# Altium PCB PCB1.PcbDoc
Units mm, origin at the board's own origin, x right, y up, seen from the top; angles counter-clockwise.
Board outline 42 x 40 mm, 2 copper layers (Top Layer, Bottom Layer); 88 components, 82 nets, 233 pads, 43 vias.
Unrouted connection lines stored in the file: 1.
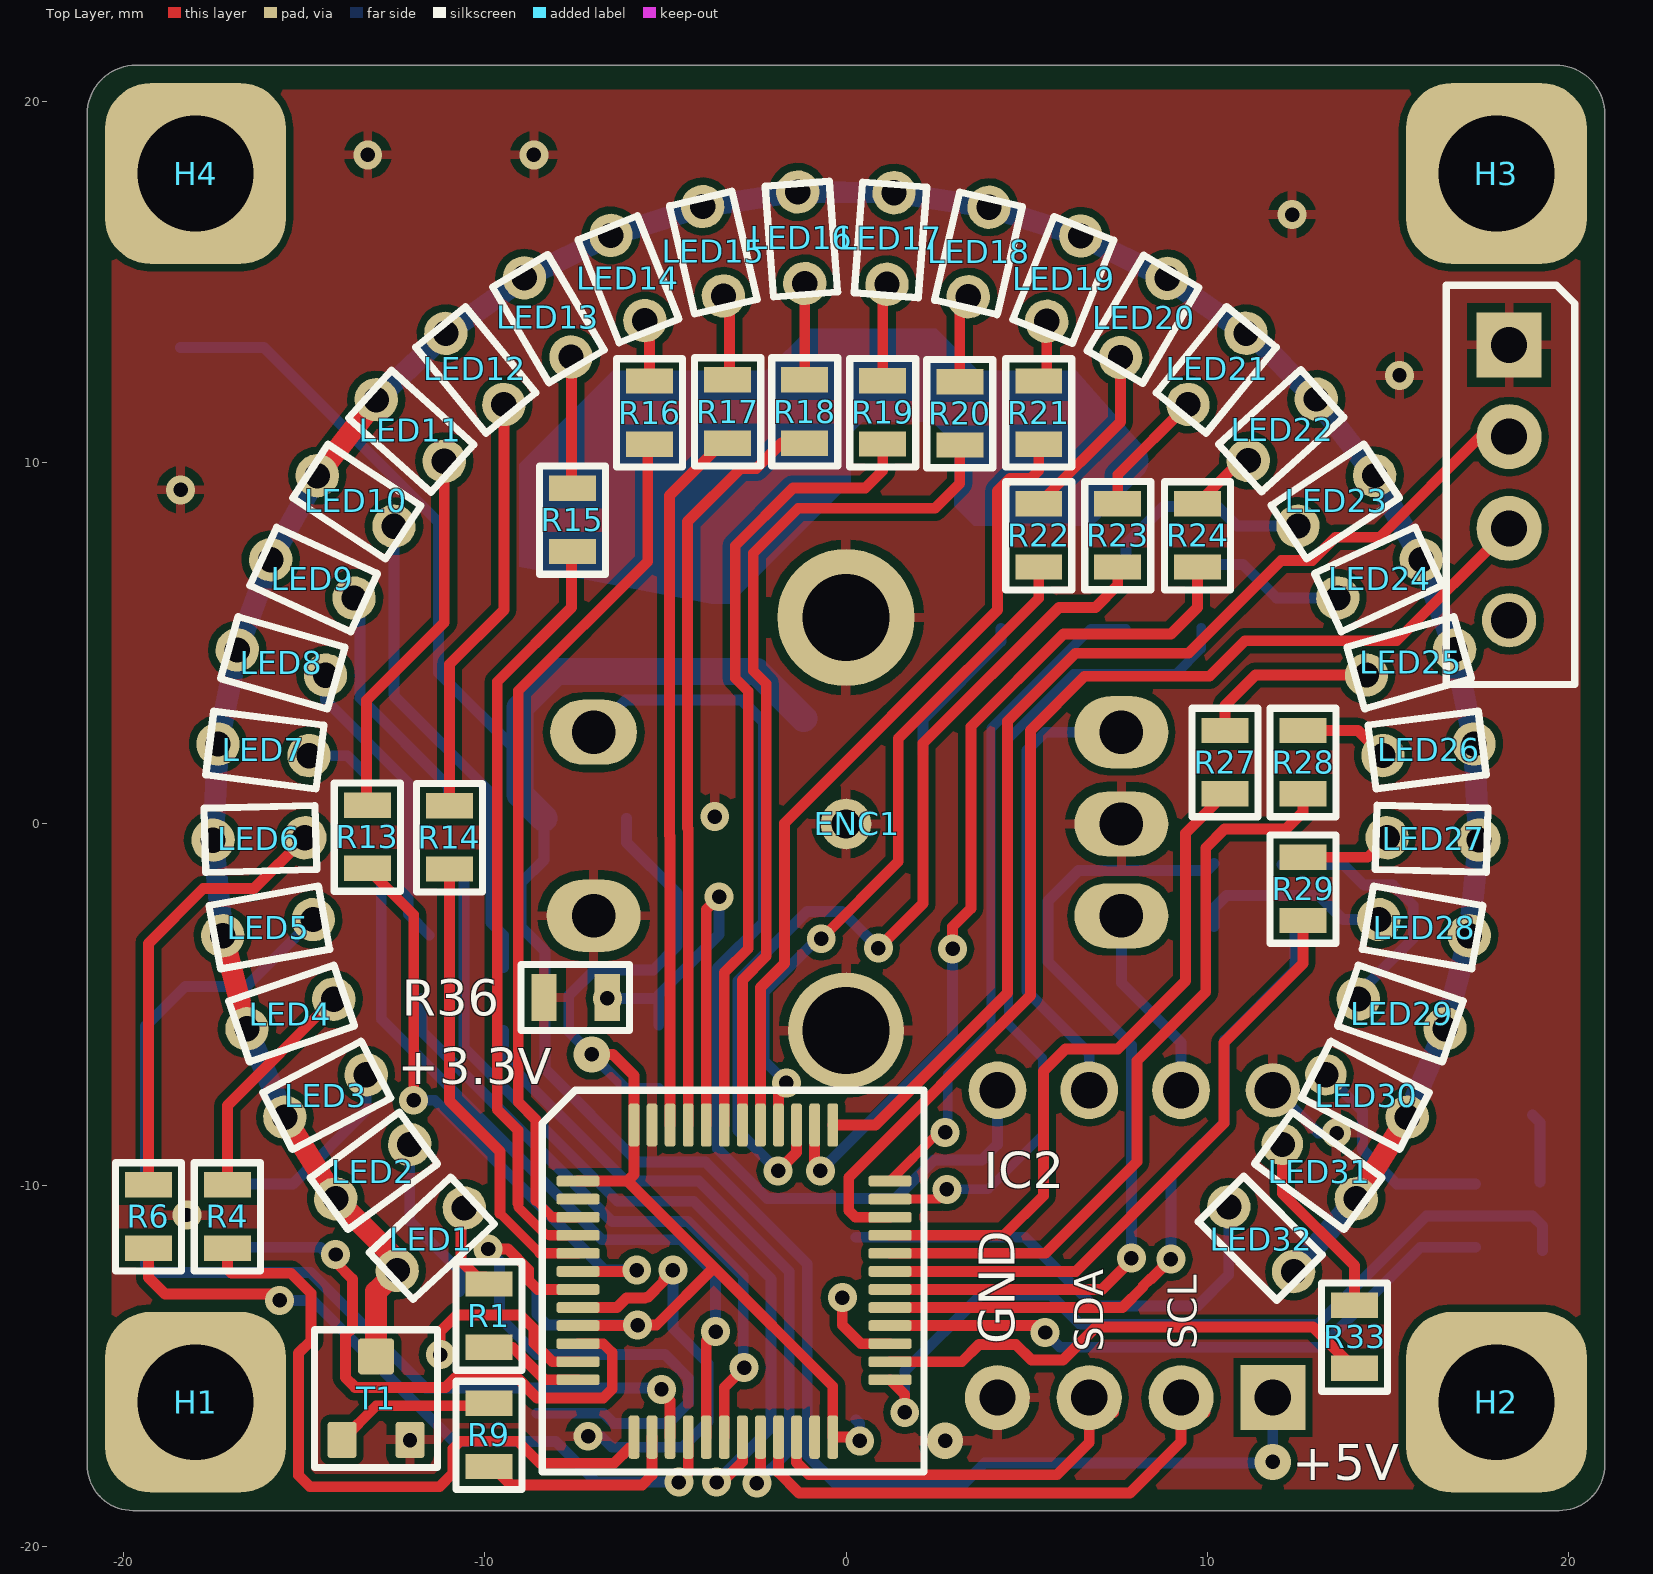
[diagram p0: Top Layer view]
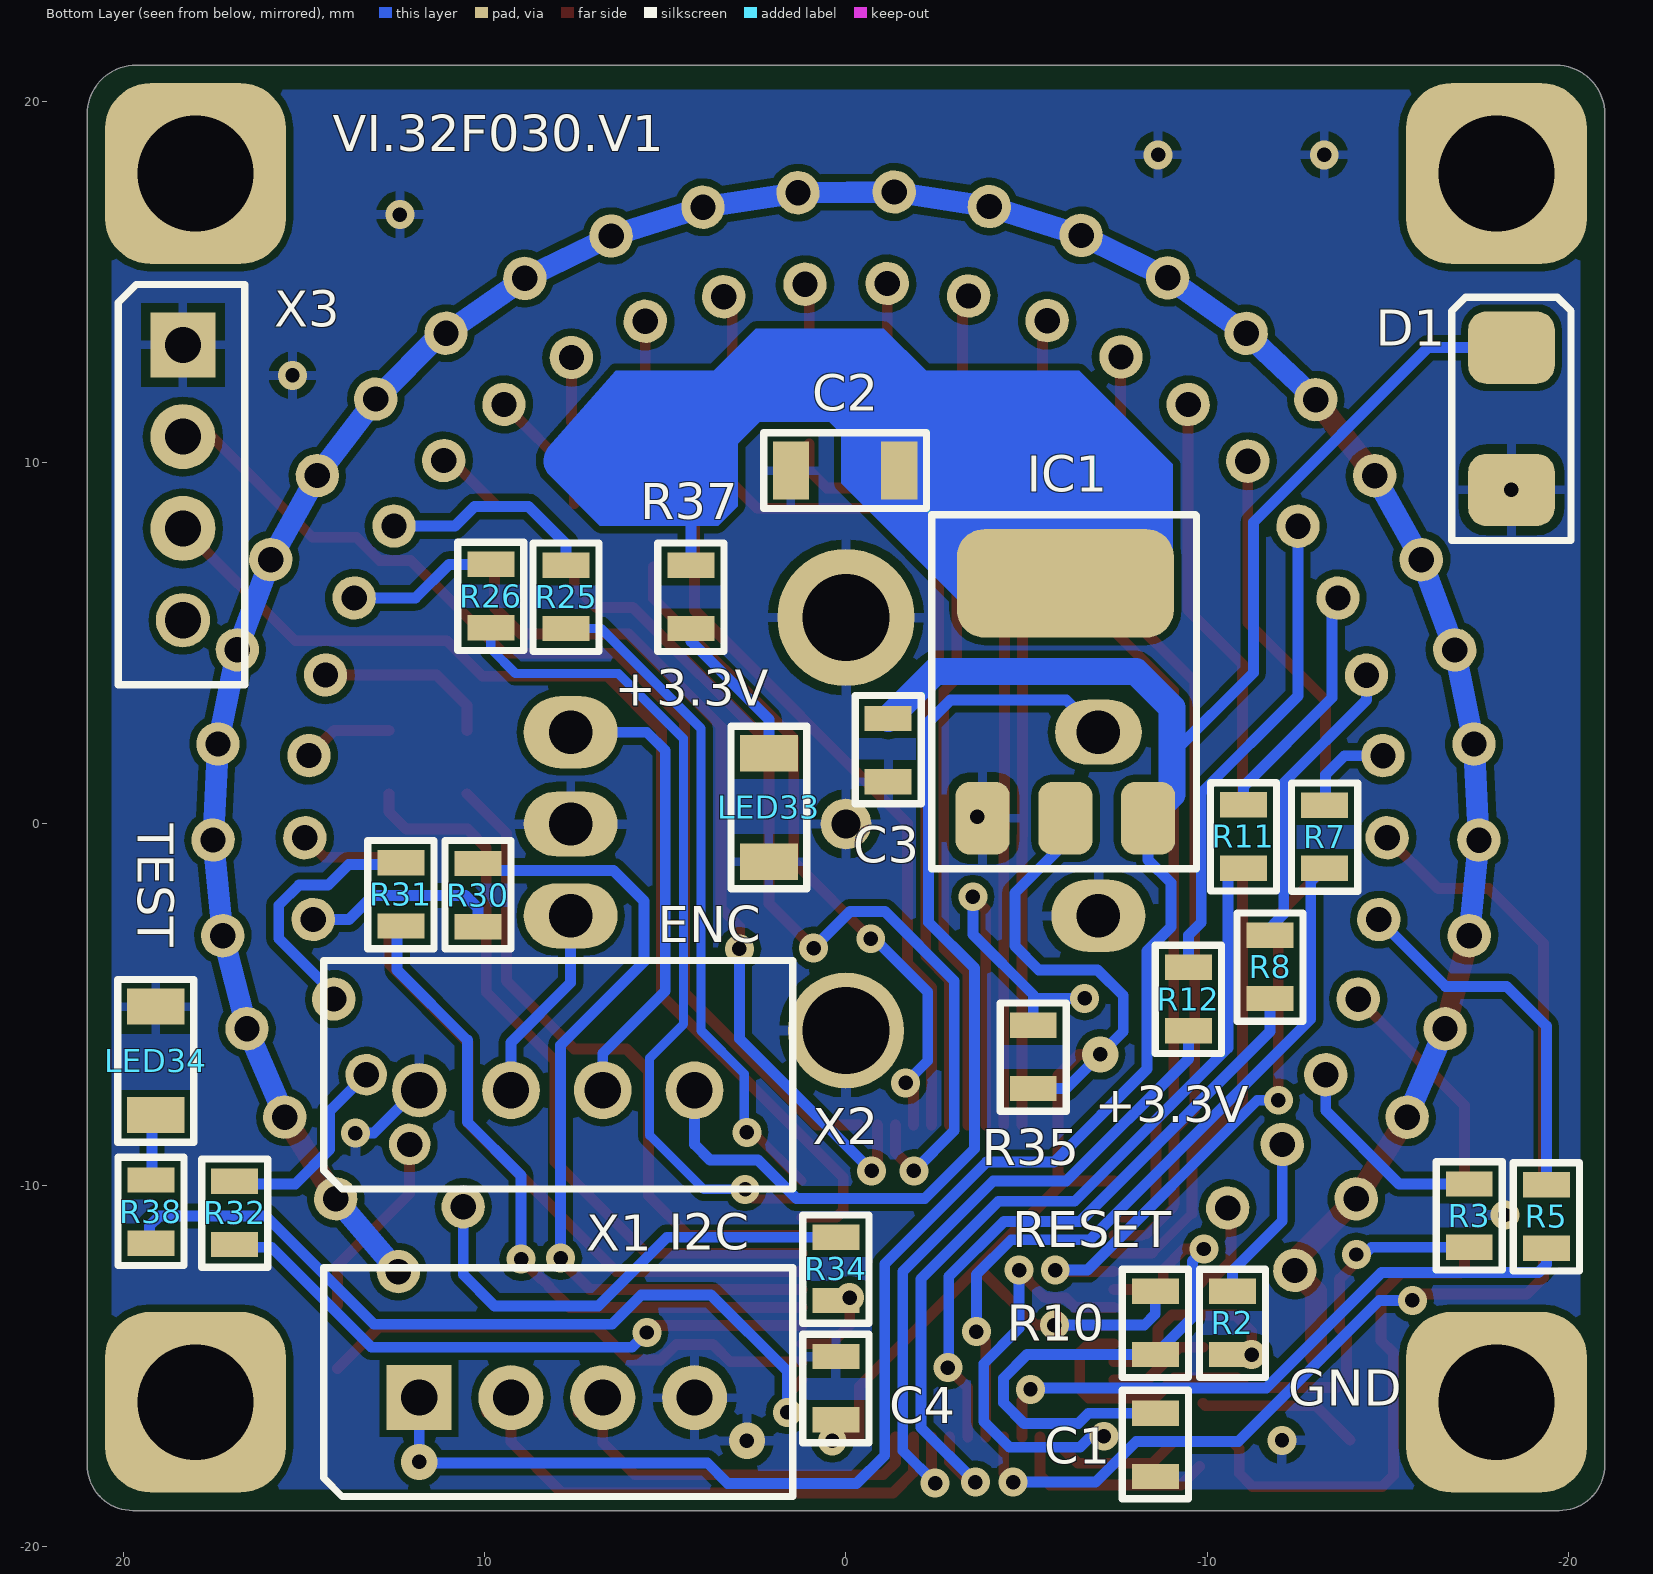
[diagram p1: Bottom Layer view, seen from below]
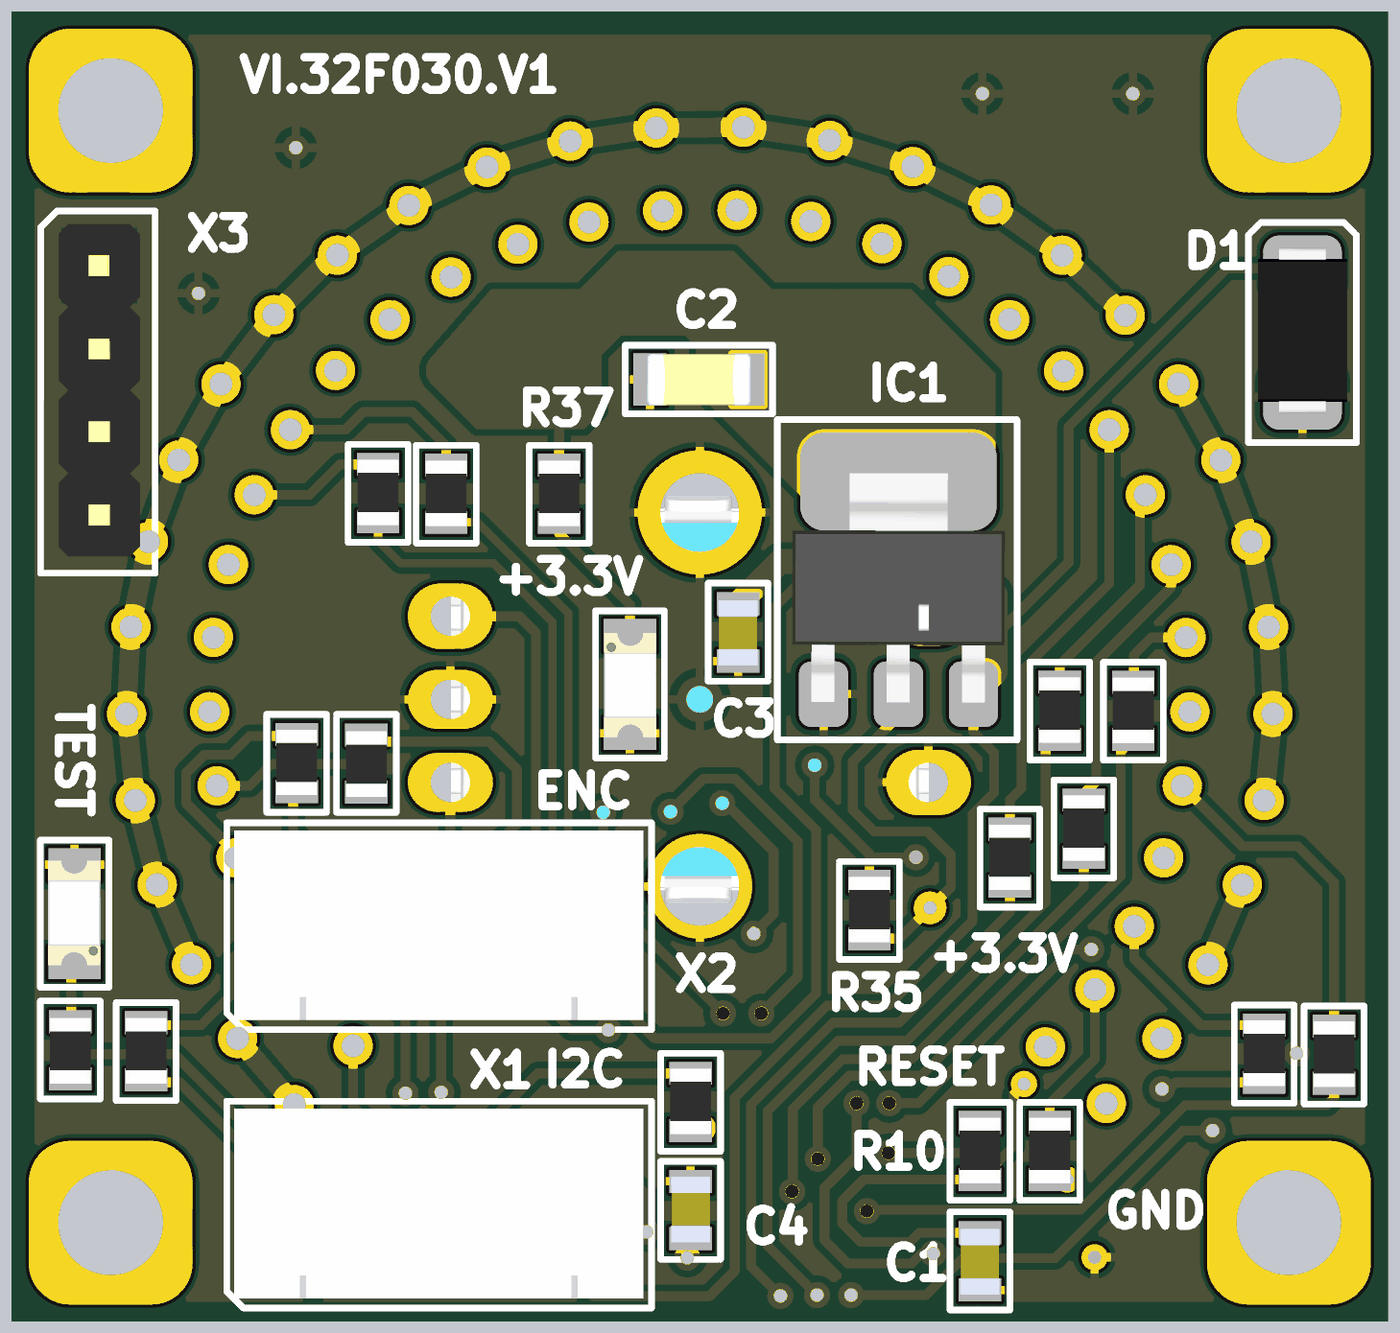
[diagram p2: 3D render of the assembled board from below, using the file's embedded part models]

## Layer stack, top to bottom
Top Solder: solder mask 0.0102, Solder Resist, Dk 3.5
Top Layer: signal copper 0.0356
Dielectric 1: dielectric 0.32, FR-4, Dk 4.8
Bottom Layer: signal copper 0.0356
Bottom Solder: solder mask 0.0102, Solder Resist, Dk 3.5

## Board outline
-21,-17.735 -21,19.64 cw(c-19.64,19.64) -19.64,21 19.64,21 cw(c19.64,19.64) 21,19.64 21,-17.735 cw(c19.735,-17.735) 19.735,-19 -19.735,-19 cw(c-19.735,-17.735)

## Design rules (kind name [scope] priority, off if disabled: settings)
Clearance [All] p1: gap=0.2 ignorepadtopadclearanceinfootprint=FALSE except(0: Arc-Hole Track-Hole SMDPad-Hole THPad-Hole Via-Hole Fill-Hole Poly-Hole Region-Hole Text-Hole)
DiffPairsRouting [All] p1: maxlimit=0.254 minlimit=0.254 mostfreqgap=0.254 substack1={56BEB4C9-513A-4C2A-A350-43480AF15A28} toplayer_{56beb4c9-513a-4c2a-a350-43480af15a28}_minwidth=0.381 toplayer_{56beb4c9-513a-4c2a-a350-43480af15a28}_maxwidth=0.381 toplayer_{56beb4c9-513a-4c2a-a350-43480af15a28}_prefwidth=0.381 bottomlayer_{56beb4c9-513a-4c2a-a350-43480af15a28}_minwidth=0.381 bottomlayer_{56beb4c9-513a-4c2a-a350-43480af15a28}_maxwidth=0.381 bottomlayer_{56beb4c9-513a-4c2a-a350-43480af15a28}_prefwidth=0.381 toplayer_minwidth=0.381 toplayer_maxwidth=0.381 toplayer_prefwidth=0.381 bottomlayer_minwidth=0.381 bottomlayer_maxwidth=0.381 bottomlayer_prefwidth=0.381 substack2={CBEAA84F-F568-4D52-823B-980D2BD1A591} toplayer_{cbeaa84f-f568-4d52-823b-980d2bd1a591}_minwidth=0.381 toplayer_{cbeaa84f-f568-4d52-823b-980d2bd1a591}_maxwidth=0.381 toplayer_{cbeaa84f-f568-4d52-823b-980d2bd1a591}_prefwidth=0.381 bottomlayer_{cbeaa84f-f568-4d52-823b-980d2bd1a591}_minwidth=0.381 bottomlayer_{cbeaa84f-f568-4d52-823b-980d2bd1a591}_maxwidth=0.381 bottomlayer_{cbeaa84f-f568-4d52-823b-980d2bd1a591}_prefwidth=0.381 maxuncoupledlength=12.7
PolygonConnect [All] p1: connectstyle=Relief reliefconductorwidth=0.254 reliefentries=4 polygonreliefangle="90 Angle" airgapwidth=0.254
RoomDefinition Sheet1 [InComponentClass('Sheet1')] p1: confinementstyle=ConfineIn formatcopy=TRUE lockcomponents=FALSE outline -75,-80 -24.2,-80 -24.2,-54.6 -75,-54.6
RoutingVias [All] p1: holewidth=0.711 width=1.27 viastyle="Through Hole" minholewidth=0.711 minwidth=1.27 maxholewidth=0.711 maxwidth=1.27
SolderMaskExpansion [All] p1: expansion=0.102 istentingtop=FALSE
Width [All] p1: maxlimit=1.5 minlimit=0.254 preferedwidth=0.254 substack1={56BEB4C9-513A-4C2A-A350-43480AF15A28} substack2={CBEAA84F-F568-4D52-823B-980D2BD1A591}
29 further rules are at their usual default settings.

## Components (designator, comment, footprint, x,y, rotation, side; value= is the part's Value field where it differs from the comment)
C1 "0.1 мкФ" "Конденсатор SMD Case 0805" -8.56,-17.196 r270 bottom
C2 "0.1 мкФ" "Конденсатор SMD Case 1206" 0.025,9.779 r0 bottom
C3 "0.1 мкФ" "Конденсатор SMD Case 0805" -1.168,2.031 r270 bottom
C4 "0.1 мкФ" "Конденсатор SMD Case 0805" 0.279,-15.596 r90 bottom
D1 "SMAJ-5.0A" "Диод SS14" -18.415,11.278 r270 bottom
ENC1 "EC11E" Encoder -2.54,1.27 r90 top
H1 "3.2mm" "Отверстие 3,2" -18,-16 r0 top
H2 "3.2mm" "Отверстие 3,2" 18,-16 r0 top
H3 "3.2mm" "Отверстие 3,2" 18,18 r0 top
H4 "3.2mm" "Отверстие 3,2" -18,18 r0 top
IC1 "AMS1117-3.3V" SOT-223 -6.071,2.159 r180 bottom
IC2 "STM32F030С6T6" TQFP-48 -3.175,-12.7 r270 top
LED1 "Синий" "Светодиод  3x2 mm"#1 -11.49,-11.49 r222.9 top
LED2 "Синий" "Светодиод  3x2 mm"#1 -13.096,-9.62 r216.3 top
LED3 "Синий" "Светодиод  3x2 mm"#1 -14.402,-7.526 r207.59 top
LED4 "Синий" "Светодиод  3x2 mm"#1 -15.376,-5.258 r198.88 top
LED5 "Синий" "Светодиод  3x2 mm"#1 -15.995,-2.869 r190.17 top
LED6 "Синий" "Светодиод  3x2 mm"#1 -16.245,-0.414 r181.46 top
LED7 "Синий" "Светодиод  3x2 mm"#1 -16.12,2.051 r172.75 top
LED8 "Синий" "Светодиод  3x2 mm"#1 -15.624,4.468 r164.04 top
LED9 "Синий" "Светодиод  3x2 mm"#1 -14.767,6.783 r155.33 top
LED10 "Синий" "Светодиод  3x2 mm"#1 -13.569,8.941 r146.62 top
LED11 "Синий" "Светодиод  3x2 mm"#1 -12.059,10.892 r137.91 top
LED12 "Синий" "Светодиод  3x2 mm"#1 -10.27,12.593 r129.2 top
LED13 "Синий" "Светодиод  3x2 mm"#1 -8.255,14.02 r120.49 top
LED14 "Синий" "Светодиод  3x2 mm"#1 -6.037,15.109 r111.78 top
LED15 "Синий" "Светодиод  3x2 mm"#1 -3.679,15.849 r103.07 top
LED16 "Синий" "Светодиод  3x2 mm"#1 -1.237,16.223 r94.36 top
LED17 "Синий" "Светодиод  3x2 mm"#1 1.233,16.203 r85.65 top
LED18 "Синий" "Светодиод  3x2 mm"#1 3.672,15.83 r76.94 top
LED19 "Синий" "Светодиод  3x2 mm"#1 6.027,15.091 r68.23 top
LED20 "Синий" "Светодиод  3x2 mm"#1 8.243,14.004 r59.52 top
LED21 "Синий" "Светодиод  3x2 mm"#1 10.268,12.595 r50.81 top
LED22 "Синий" "Светодиод  3x2 mm"#1 12.072,10.908 r42.1 top
LED23 "Синий" "Светодиод  3x2 mm"#1 13.568,8.943 r33.39 top
LED24 "Синий" "Светодиод  3x2 mm"#1 14.766,6.785 r24.68 top
LED25 "Синий" "Светодиод  3x2 mm"#1 15.623,4.471 r15.97 top
LED26 "Синий" "Светодиод  3x2 mm"#1 16.12,2.054 r7.26 top
LED27 "Синий" "Светодиод  3x2 mm"#1 16.245,-0.411 r358.55 top
LED28 "Синий" "Светодиод  3x2 mm"#1 15.995,-2.866 r349.84 top
LED29 "Синий" "Светодиод  3x2 mm"#1 15.377,-5.256 r341.13 top
LED30 "Синий" "Светодиод  3x2 mm"#2 14.403,-7.524 r332.42 top
LED31 "Синий" "Светодиод  3x2 mm"#2 13.098,-9.618 r323.71 top
LED32 "Синий" "Светодиод  3x2 mm"#1 11.49,-11.49 r315 top
LED33 "Синий" "SMD 1206 Светодиод ВАЙТ" 2.134,0.457 r270 bottom
LED34 "Синий" "SMD 1206 Светодиод ВАЙТ" 19.1,-6.554 r90 bottom
R1 "1 кОм" "SMD 0805 Резистор" -9.881,-13.589 r90 top
R2 "1 кОм" "SMD 0805 Резистор" -10.693,-13.792 r90 bottom
R3 "1 кОм" "SMD 0805 Резистор" -17.247,-10.82 r90 bottom
R4 "1 кОм" "SMD 0805 Резистор" -17.12,-10.846 r90 top
R5 "1 кОм" "SMD 0805 Резистор" -19.38,-10.846 r90 bottom
R6 "1 кОм" "SMD 0805 Резистор" -19.304,-10.846 r90 top
R7 "1 кОм" "SMD 0805 Резистор" -13.246,-0.338 r90 bottom
R8 "1 кОм" "SMD 0805 Резистор" -11.735,-3.937 r90 bottom
R9 "1 кОм" "SMD 0805 Резистор" -9.881,-16.891 r90 top
R10 "10 кОм" "SMD 0805 Резистор" -8.56,-13.792 r90 bottom
R11 "1 кОм" "SMD 0805 Резистор" -10.998,-0.33 r90 bottom
R12 "1 кОм" "SMD 0805 Резистор" -9.474,-4.827 r90 bottom
R13 "1 кОм" "SMD 0805 Резистор" -13.246,-0.338 r90 top
R14 "1 кОм" "SMD 0805 Резистор" -10.973,-0.356 r90 top
R15 "1 кОм" "SMD 0805 Резистор" -7.569,8.433 r90 top
R16 "1 кОм" "SMD 0805 Резистор" -5.436,11.4 r90 top
R17 "1 кОм" "SMD 0805 Резистор" -3.277,11.43 r90 top
R18 "1 кОм" "SMD 0805 Резистор" -1.143,11.43 r90 top
R19 "1 кОм" "SMD 0805 Резистор" 1.016,11.405 r90 top
R20 "1 кОм" "SMD 0805 Резистор" 3.15,11.381 r90 top
R21 "1 кОм" "SMD 0805 Резистор" 5.334,11.4 r90 top
R22 "1 кОм" "SMD 0805 Резистор" 5.334,8 r90 top
R23 "1 кОм" "SMD 0805 Резистор" 7.518,8.005 r90 top
R24 "1 кОм" "SMD 0805 Резистор" 9.728,8 r90 top
R25 "1 кОм" "SMD 0805 Резистор" 7.747,6.299 r90 bottom
R26 "1 кОм" "SMD 0805 Резистор" 9.83,6.325 r90 bottom
R27 "1 кОм" "SMD 0805 Резистор" 10.49,1.727 r90 top
R28 "1 кОм" "SMD 0805 Резистор" 12.648,1.727 r90 top
R29 "1 кОм" "SMD 0805 Резистор" 12.648,-1.778 r90 top
R30 "1 кОм" "SMD 0805 Резистор" 10.185,-1.981 r270 bottom
R31 "1 кОм" "SMD 0805 Резистор" 12.319,-1.93 r90 bottom
R32 "1 кОм" "SMD 0805 Резистор" 16.916,-10.744 r90 bottom
R33 "1 кОм" "SMD 0805 Резистор" 14.072,-14.173 r90 top
R34 "1 кОм" "SMD 0805 Резистор" 0.279,-12.294 r90 bottom
R35 "10 Ом" "SMD 0805 Резистор" -5.182,-6.426 r90 bottom
R36 "10 кОм" "SMD 0805 Резистор" -7.466,-4.801 r0 top
R37 "1 кОм" "SMD 0805 Резистор" 4.293,6.299 r90 bottom
R38 "1 кОм" "SMD 0805 Резистор" 19.234,-10.744 r270 bottom
T1 "SI2302 (A2SHB)" "SMD SOT-23 Транзистор 3 pin" -13.005,-15.9 r180 top
X1 "XH2.54-4" "(1x4) PIN XH 2.54 HEADR"#1 6.731,-15.915 r90 bottom
X2 "XH2.54-4" "(1x4) PIN XH 2.54 HEADR"#2 6.731,-7.406 r90 bottom
X3 "2.54" "(1x4)PIN 2.54 HEADR" 18.39,8.179 r180 bottom

## Footprints (in the part's own frame and the unit in brackets; to place one, negate y for a bottom-side part, rotate by r counter-clockwise, add the part's x,y. Pads: shape width x height; smd on the part's side, far side on the other; paste and mask are expansions set on the pad)
"(1x4) PIN XH 2.54 HEADR"#1 [mm]
  rect 1.8x1.8 hole 1: 1(0.04,5.08)
  round 1.8 hole 1: 2(0.04,2.54) 3(0.04,0) 4(0.04,-2.54)
  silkscreen extent -2.69,-5.26 3.63,7.72, body extent -2.4,-5.01 3.4,7.49, height 7
"(1x4) PIN XH 2.54 HEADR"#2 [mm]
  round 1.5 hole 1: 1(0.04,5.08)
  round 1.6 hole 1: 2(0.04,2.54) 3(0.04,0) 4(0.04,-2.54)
  silkscreen extent -2.69,-5.26 3.63,7.72, body extent -2.4,-5.01 3.4,7.49, height 7
"(1x4)PIN 2.54 HEADR" [mm]
  rect 1.8x1.8 hole 1: 1(0.04,5.08)
  round 1.8 hole 1: 2(0.04,2.54) 3(0.04,0)
  round 1.5 hole 1: 4(0.04,-2.54)
  silkscreen extent -1.75,-4.33 1.75,6.75, body extent -1.21,-3.81 1.28,6.35, height 8.54
Encoder [mm]
  round 3.2 hole 2.4: 1(-6.985,-2.54)
  round 3.8 hole 2.4: 2(4.445,-2.54)
  oval 2x2.6 hole 1.2: 3(-3.81,4.445) 7(1.27,-10.16)
  oval 1.8x2.4 hole 1.2: 4(1.27,4.445)
  oval 1.8x2.6 hole 1.2: 5(-3.81,-10.16) 6(-1.27,-10.16)
  body extent -7.5,-10.14 4.96,4.46, height 16.5
"SMD 0805 Резистор" [mm]
  rect 0.7x1.3 smd: 1(-0.89,0) 2(0.86,0)
  silkscreen extent -1.52,-0.91 1.47,0.91, body extent -1,-0.62 1,0.63, height 0.6
"SMD 1206 Светодиод ВАЙТ" [mm]
  rect 1x1.6 smd: 1(-1.5,0) 2(1.5,0)
  silkscreen extent -2.25,-1.05 2.25,1.05, body extent -1.57,-0.79 1.63,0.81, height 1.1
"SMD SOT-23 Транзистор 3 pin" [mm]
  rrect20% 0.8x1 smd: 1(0.94,1.143) 3(-0.94,1.143)
  rrect20% 1x1 smd: 2(0,-1.168)
  silkscreen extent -1.7,-1.91 1.7,1.91, body extent -1.5,-1.25 1.5,1.25, height 1.15
SOT-223 [mm]
  rrect50% 1.5x2 smd: 1(-2.29,-2) 2(0,-2) 3(2.29,-2)
  rrect50% 6x3 smd: 4(0,4.5)
  silkscreen extent -3.7,-3.4 3.63,6.4, body extent -3.25,-2.25 3.25,4.75, height 1.66
TQFP-48 [mm]
  rrect50% 0.3x1.2 smd: 1(-2.819,-4.242) 2(-2.319,-4.242) 3(-1.819,-4.242) 4(-1.319,-4.242) 5(-0.819,-4.242) 6(-0.319,-4.242) 7(0.181,-4.242) 8(0.681,-4.242) 9(1.181,-4.242) 10(1.681,-4.242) 11(2.181,-4.242) 12(2.681,-4.242) 25(2.681,4.394) 26(2.181,4.394) 27(1.681,4.394) 28(1.181,4.394) 29(0.681,4.394) 30(0.181,4.394) 31(-0.319,4.394) 32(-0.819,4.394) 33(-1.319,4.394) 34(-1.819,4.394) 35(-2.319,4.394) 36(-2.819,4.394)
  rrect50% 1.2x0.3 smd: 13(4.267,-2.692) 14(4.267,-2.192) 15(4.267,-1.692) 16(4.267,-1.192) 17(4.267,-0.692) 18(4.267,-0.192) 19(4.267,0.308) 20(4.267,0.808) 21(4.267,1.308) 22(4.267,1.808) 23(4.267,2.308) 24(4.267,2.808) 37(-4.369,2.808) 38(-4.369,2.308) 39(-4.369,1.808) 40(-4.369,1.308) 41(-4.369,0.808) 42(-4.369,0.308) 43(-4.369,-0.192) 44(-4.369,-0.692) 45(-4.369,-1.192) 46(-4.369,-1.692) 47(-4.369,-2.192) 48(-4.369,-2.692)
  silkscreen extent -5.33,-5.23 5.23,5.33, body extent -4.57,-4.44 4.43,4.55, height 1.5
"Диод SS14" [mm]
  rrect50% 2x2.4 smd: 1(2.032,0) 2(-1.905,0)
  silkscreen extent -3.3,-1.65 3.43,1.65, body extent -2.53,-1.36 2.53,1.36, height 2.5
"Конденсатор SMD Case 0805" [mm]
  rect 0.7x1.3 smd: 1(-0.89,0) 2(0.86,0)
  silkscreen extent -1.52,-0.91 1.47,0.91, body extent -1,-0.6 1,0.6, height 0.9
"Конденсатор SMD Case 1206" [mm]
  rect 1x1.6 smd: 1(-1.5,0) 2(1.5,0)
  silkscreen extent -2.25,-1.05 2.25,1.05, body extent -1.6,-0.8 1.6,0.8, height 0.94
"Отверстие 3,2" [mm]
  rrect50% 5x5 hole 3.2: 1(0,0)
"Светодиод  3x2 mm"#1 [mm]
  round 1.2 hole 0.7: 1(-1.27,0) 2(1.27,0)
  silkscreen extent -1.57,-0.89 1.5,0.89, body extent -1.59,-0.99 1.59,0.99, height 4.2
"Светодиод  3x2 mm"#2 [mm]
  round 1.15 hole 0.7: 1(-1.27,0)
  round 1.2 hole 0.7: 2(1.27,0)
  silkscreen extent -1.57,-0.89 1.5,0.89, body extent -1.59,-0.99 1.59,0.99, height 4.2

## Part data
C1 C3 C4: library part Конденсатор, Case="SMD 0805"
C2: library part Конденсатор, Case="SMD 1206"
D1: library part Диод, Case=DO-214AC
ENC1: library part Encoder_01, Case=-
H1 H2 H3 H4: library part "Отверстие монтажное", Case=Отверстие
IC1: library part AMS1117, Case=SOT-223
IC2: library part STM32F030
LED1 LED2 LED3 LED4 LED5 LED6 LED7 LED8 LED9 LED10 LED11 LED12 LED13 LED14 LED15 LED16 LED17 LED18 LED19 LED20 LED21 LED22 LED23 LED24 LED25 LED26 LED27 LED28 LED29 LED30 LED31 LED32: library part Светодиод, Case=3x2x4
LED33 LED34: library part Светодиод, Case="SMD 1206"
R1 R2 R3 R4 R5 R6 R7 R8 R9 R10 R11 R12 R13 R14 R15 R16 R17 R18 R19 R20 R21 R22 R23 R24 R25 R26 R27 R28 R29 R30 R31 R32 R33 R34 R35 R36 R37 R38: library part Резистор, Case="SMD 0805"
T1: library part "Транзистор MOSFET N-конал (как n-p-n)", Case=SOT-23
X1 X2 X3: library part "(1x4) pin XH 2.54 Header"
  X1 X2: Case=XH2.54-4

## Free pads (board coordinates)
  round 1.4 hole 0.8 mask+0.102: 2(0,0)

## Via types
v1: diameter 0.8, hole 0.4, Top Layer to Bottom Layer, tented both sides, 37 vias
v2: diameter 1, hole 0.4, Top Layer to Bottom Layer, tented bottom, 2 vias
v3: diameter 0.8, hole 0.4, Top Layer to Bottom Layer, 2 vias
v4: diameter 1, hole 0.4, Top Layer to Bottom Layer, 1 vias
v5: diameter 0.8, hole 0.4, Top Layer to Bottom Layer, tented bottom, 1 vias

## Nets (pads, with @x,y where several pads share a name; then routed paths per layer and width w, separated by ;. In a path a pad name is that pad's centre, name@x,y a point inside that pad or via, vN(x,y) a via of type N, cw(c..) or ccw(c..) an arc to the next point about the centre after c; other vN are vias at no path point)
+5V: C3.1 D1.2 IC1.3 X1.1 | length 66.1
  Bottom Layer w0.3: D1.2 -16.106,13.183 -11.273,8.349 -11.273,4.186 -9.024,1.937 ; IC1.3 -8.361,-0.995 -8.992,-1.626 -8.992,-2.853 -8.331,-3.513 -8.331,-6.782 -5.755,-9.358 -3.891,-9.358 -1.071,-12.178 -1.071,-17.471 -0.294,-18.248 3.27,-18.248 3.84,-17.678 v2@11.811,-17.678 ; v2(11.811,-17.653) X1.1
  Bottom Layer w0.75: IC1.3 -9.024,0.822 -9.024,1.937 -9.024,3.219 -8.026,4.216 -2.464,4.216 C3.1
BOOT0: IC2.44 R35.2 R36.2 | length 12.1
  Top Layer w0.3: IC2.44 -3.867,-2.37 v1(-3.511,-2.013)
  Bottom Layer w0.3: v1(-6.604,-4.826) -5.182,-4.826 ; R35.2 -5.182,-4.826 ; v1(-3.511,-2.013) -3.511,-3.054 -5.182,-4.724 -5.182,-4.826
GND: C1.2 C2.2 C3.2 C4.2 D1.1 ENC1.1 ENC1.2 ENC1.3 ENC1.6 IC1.1 IC2.8 IC2.23 IC2.47 LED33.2 LED34.2 pad.2 R36.1 T1.3 X1.4 X2.1 X3.1 | length 13.8
  Top Layer w0.3: IC2.8 -6.339,-13.381 -6.076,-13.118 -5.563,-13.118 -5.539,-13.094 -5.481,-13.094 -5.041,-12.655 -5.041,-12.596 v1(-4.791,-12.346)
  Bottom Layer w0.3: v1(-7.137,-16.942) -6.782,-16.942 -6.477,-17.247 -4.521,-17.247 -3.81,-16.535 -3.81,-14.935 -4.791,-13.954 v1(-4.791,-12.346) ; X2.1 11.882,-7.366 13.068,-8.552 v1(13.575,-8.552) v1@13.702,-8.552
  other v1: -18.237,-10.82 -3.632,0.203 -18.415,9.246 15.316,12.413 12.344,16.866 -13.233,18.517 -8.636,18.517
  other v2: 2.743,-17.069
  other v3: -12.065,-17.058
LED_0: IC2.12 R1.1 | length 2.8
  Top Layer w0.3: R1.1 -9.231,-14.479 -8.381,-15.329 -8.381,-15.343 -8.343,-15.381 IC2.12
LED_1: IC2.11 R2.1 | length 5.5
  Top Layer w0.3: v1@-11.225,-14.679 -11.176,-14.728 -11.178,-14.73 v1(-11.227,-14.681) -11.227,-14.046 -10.77,-13.589 -9.017,-13.589 -8.636,-13.97 -8.636,-14.367 -8.122,-14.881 IC2.11
LED_2: IC2.10 R3.1 | length 16.9
  Top Layer w0.3: v5(-14.122,-11.913) -14.122,-12.128 -13.655,-12.596 -13.655,-13.946 -13.855,-14.146 -13.855,-15.318 -13.591,-15.582 -13.591,-15.597 -11.082,-15.597 -10.816,-15.331 -9.086,-15.331 -8.881,-15.536 -8.881,-15.55 -8.55,-15.881 -6.716,-15.881 -6.467,-15.632 -6.467,-14.63 -6.716,-14.381 IC2.10
  Bottom Layer w0.3: R3.1 -14.54,-11.711 -14.338,-11.913 v5(-14.122,-11.913)
LED_3: IC2.13 R4.1 | length 19
  Top Layer w0.3: R4.1 -17.12,-12.319 -17.006,-12.433 -15.361,-12.433 -14.808,-12.986 -14.808,-14.3 -15.15,-14.642 -15.15,-18.022 -14.834,-18.339 -11.252,-18.339 -10.881,-17.967 -10.881,-17.286 -10.676,-17.081 -9.086,-17.081 -8.475,-17.692 -6.42,-17.692 IC2.13@-5.981,-17.252
LED_4: IC2.15 R5.1 | length 17.7
  Top Layer w0.3: v1(-5.105,-15.646) -5.182,-15.646 -4.867,-15.961 IC2.15
  Bottom Layer w0.3: R5.1 -19.38,-12.192 -19.161,-12.411 -14.822,-12.411 -11.627,-15.605 -5.146,-15.605 v1(-5.105,-15.646)
LED_5: IC2.16 R6.1 | length 19.3
  Top Layer w0.3: R6.1 -19.304,-12.548 -18.847,-13.005 v1@-15.697,-13.005 ; v1(-15.672,-13.183) v1@-15.616,-13.183 ; v1(-4.623,-18.212) -4.367,-17.956 IC2.16
  Bottom Layer w0.3: v1(-15.672,-13.183) -14.757,-13.183 -10.854,-17.086 -8.034,-17.086 -7.56,-17.56 -6.909,-18.212 v1(-4.623,-18.212) v1@-4.731,-18.32
LED_6: IC2.17 R7.1 | length 21.1
  Top Layer w0.3: IC2.17 -3.867,-14.307 v1(-3.607,-14.046)
  Bottom Layer w0.3: R7.1@-13.223,-1.228 -12.862,-1.588 -12.862,-5.4 -6.756,-11.506 -4.571,-11.506 -3.607,-12.47 v1(-3.607,-14.046)
LED_7: IC2.18 R8.1 | length 17.3
  Top Layer w0.3: IC2.18 -3.367,-15.592 v1(-2.821,-15.045)
  Bottom Layer w0.3: R8.1 -11.735,-5.739 -6.476,-10.998 -4.372,-10.998 -2.845,-12.525 -2.845,-15.021 v1(-2.821,-15.045)
LED_8: IC2.19 R11.1 | length 24.4
  Top Layer w0.3: v1(-3.581,-18.212) -3.429,-18.212 -2.867,-17.65 IC2.19
  Bottom Layer w0.3: R11.1 -10.566,-1.221 -10.566,-6.201 -6.328,-10.439 -4.223,-10.439 -2.071,-12.592 -2.071,-16.701 v1(-3.581,-18.212)
LED_9: IC2.20 R12.1 | length 18.6
  Top Layer w0.3: v1@-2.367,-18.207 IC2.20
  Bottom Layer w0.3: R12.1 -9.474,-6.502 -6.096,-9.881 -4.075,-9.881 -1.571,-12.385 -1.571,-17.344 v1(-2.464,-18.237)
LED_10: IC2.6 R13.1 | length 16.7
  Top Layer w0.3: R13.1 -11.963,-2.51 v1(-11.963,-7.645) ; IC2.6 -5.827,-12.381 v1(-5.791,-12.344)
  Bottom Layer w0.3: v1(-11.963,-7.645) -11.379,-7.645 -6.68,-12.344 v1(-5.791,-12.344)
LED_11: IC2.5 R14.1 | length 12.7
  Top Layer w0.256: -9.576,-10.775 -8.47,-11.881
  Top Layer w0.3: R14.1 -10.973,-7.663 -9.576,-9.06 -9.576,-10.775 ; -8.47,-11.881 IC2.5
LED_12: IC2.4 R15.1 | length 20.9
  Top Layer w0.256: -9.076,-10.494 -9.076,-10.599 -8.316,-11.359 -8.212,-11.359 -8.19,-11.381
  Top Layer w0.3: -9.076,-10.494 -9.076,-8.476 -9.652,-7.899 -9.652,3.937 -7.595,5.994 R15.1@-7.595,7.238 ; -8.19,-11.381 IC2.4
LED_13: IC2.3 R16.1 | length 23.8
  Top Layer w0.256: -8.576,-10.423 -8.118,-10.881
  Top Layer w0.3: -8.576,-10.423 -8.576,-8.188 -9.068,-7.696 -9.068,3.686 -5.486,7.268 -5.486,10.188 cw(c-5.313,10.188) R16.1@-5.436,10.311 ; -8.118,-10.881 IC2.3
LED_14: IC2.46 R17.1 | length 19.8
  Top Layer w0.3: IC2.46 -4.867,-0.329 -4.882,-0.315 -4.882,9.086 R17.1@-3.226,10.743
LED_15: IC2.45 R18.1 | length 20.8
  Top Layer w0.3: IC2.45 -4.367,-0.122 -4.382,-0.107 -4.382,8.369 -2.911,9.84 -2.482,9.84 -1.782,10.54 R18.1
LED_16: IC2.43 R19.1 | length 22.1
  Top Layer w0.3: IC2.43 -3.367,-4.112 -2.705,-3.45 -2.705,3.674 -3.065,4.035 -3.065,7.7 -1.469,9.296 0.533,9.296 1.016,9.779 R19.1
LED_17: IC2.42 R20.1 | length 23.8
  Top Layer w0.3: IC2.42 -2.867,-4.319 -2.205,-3.657 -2.205,3.882 -2.565,4.242 -2.565,7.493 -1.321,8.738 2.464,8.738 3.15,9.423 R20.1
LED_18: IC2.41 R21.1 | length 22.6
  Top Layer w0.3: IC2.41 -2.367,-4.526 -1.705,-3.864 -1.705,0.022 4.191,5.918 4.191,9.212 4.539,9.56 5.115,9.56 5.334,9.779 R21.1 R21.1@5.6,10.51
LED_19: IC2.40 R22.1 | length 19
  Top Layer w0.3: IC2.40 -1.867,-7.379 v1(-1.651,-7.163) ; v1(-0.686,-3.175) 1.448,-1.041 1.448,2.362 5.334,6.248 R22.1
  Bottom Layer w0.3: v1(-1.651,-7.163) -2.261,-6.553 -2.261,-4.648 -0.787,-3.175 v1(-0.686,-3.175)
LED_20: IC2.39 R23.1 | length 26.2
  Top Layer w0.3: v1(-1.88,-9.601) -1.367,-9.089 IC2.39 ; v1(0.895,-3.435) 2.134,-2.196 2.134,2.235 5.893,5.994 6.903,5.994 7.518,6.61 R23.1
  Bottom Layer w0.3: v1(-1.88,-9.601) -2.997,-8.484 -2.997,-4.343 -1.079,-2.425 -0.114,-2.425 v1(0.895,-3.435)
LED_21: IC2.38 R24.1 | length 24.1
  Top Layer w0.3: IC2.38 -0.867,-9.445 v1(-0.711,-9.601) ; v1(2.949,-3.454) 2.949,-2.843 3.454,-2.337 3.454,2.692 6.02,5.258 8.992,5.258 9.728,5.994 R24.1
  Bottom Layer w0.3: v1(-0.711,-9.601) 2.949,-5.941 v1(2.949,-3.454)
LED_22: IC2.36 R25.1 | length 18.7
  Top Layer w0.254: IC2.36 2.565,-8.534 v1(2.743,-8.534)
  Bottom Layer w0.254: v1(2.743,-8.534) 2.814,-8.464 2.814,-6.914 4.013,-5.715 4.013,2.642 6.78,5.409 R25.1
LED_23: IC2.35 R26.1 | length 23.3
  Top Layer w0.254: IC2.35 2.573,-10.381 2.794,-10.16 v1(2.794,-10.109)
  Bottom Layer w0.254: v1(2.794,-10.109) 3.937,-10.109 5.436,-8.611 5.436,-6.477 4.496,-5.537 4.496,2.362 6.299,4.166 9.144,4.166 9.83,4.851 R26.1
LED_24: IC2.33 R27.1 | length 18.7
  Top Layer w0.3: IC2.33 4.367,-11.381 5.461,-10.287 5.461,-6.833 6.071,-6.223 7.518,-6.223 9.398,-4.343 9.398,-0.255 R27.1
LED_25: IC2.32 R28.1 | length 21
  Top Layer w0.3: IC2.32 5.518,-11.881 8.052,-9.347 8.052,-6.553 9.957,-4.648 9.957,-0.66 10.477,-0.14 12.176,-0.14 12.648,0.332 R28.1
LED_26: IC2.31 R29.1 | length 17.5
  Top Layer w0.3: IC2.31 6.358,-12.381 9.369,-9.369 9.369,-9.368 10.457,-8.28 10.457,-6.049 12.648,-3.858 R29.1
LED_27: IC2.30 R30.1 | length 22.9
  Top Layer w0.3: IC2.30 7.084,-12.881 7.899,-12.065 v1(7.899,-12.014)
  Bottom Layer w0.3: v1(7.899,-12.014) 7.899,-6.121 5.588,-3.81 5.588,-2.134 6.432,-1.29 9.986,-1.29 R30.1
LED_28: IC2.29 R31.1 | length 19
  Top Layer w0.3: IC2.29 7.651,-13.381 8.214,-12.818 8.214,-12.794 8.419,-12.589 8.443,-12.589 v1(8.992,-12.04) v1@8.992,-11.963
  Bottom Layer w0.3: v1@8.992,-11.963 8.992,-9.729 10.478,-8.242 10.478,-5.982 12.422,-4.039 R31.1@12.422,-2.821
LED_29: IC2.28 R32.1 | length 17.6
  Top Layer w0.3: IC2.28 5.321,-13.881 v1(5.512,-14.072)
  Bottom Layer w0.3: v1(5.512,-14.072) 5.918,-14.478 13.131,-14.478 15.898,-11.711 R32.1@17.424,-11.711
LED_30: IC2.26 R33.1 | length 14.1
  Top Layer w0.3: IC2.26 3.204,-14.881 3.683,-14.402 4.699,-14.402 5.131,-14.834 6.005,-14.834 6.919,-13.919 12.927,-13.919 R33.1
LED_31: IC2.27 R34.1 | length 2.3
  Top Layer w0.3: v1@-0.127,-13.335 v1@-0.102,-13.31 ; v1(-0.102,-13.106) v1@-0.102,-13.31 ; IC2.27 0.414,-14.381 -0.102,-13.865 v1@-0.102,-13.31
NetENC1_4: ENC1.4 X2.4 | length 28.1
  Bottom Layer w0.3: ENC1.4 -6.096,3.429 -2.896,3.429 -2.286,2.819 -2.286,-2.718 -3.556,-3.988 -3.556,-8.985 -2.178,-10.363 1.372,-10.363 2.439,-9.296 3.76,-9.296 4.191,-8.865 X2.4
NetENC1_5: ENC1.5 X2.2 | length 5.5
  Bottom Layer w0.3: ENC1.5 7.62,-4.394 9.271,-6.045 X2.2
NetENC1_7: ENC1.7 X2.3 | length 12.9
  Bottom Layer w0.3: X2.3 6.731,-6.35 5.004,-4.623 5.004,2.032 5.512,2.54 ENC1.7
NetLED1_1: LED1.1 R1.2 | length 2.6
  Top Layer w0.3: LED1.1 -10.651,-10.717 -10.651,-11.445 -10.656,-11.45 -10.656,-12.071 -10.651,-12.076 -10.651,-12.091 -10.212,-12.531 -9.979,-12.531 R1.2@-9.779,-12.731
NetLED1_2: LED1.2 LED2.2 LED3.2 LED4.2 LED5.2 LED6.2 LED7.2 LED8.2 LED9.2 LED10.2 LED11.2 LED12.2 LED13.2 LED14.2 LED15.2 LED16.2 LED17.2 LED18.2 LED19.2 LED20.2 LED21.2 LED22.2 LED23.2 LED24.2 LED25.2 LED26.2 LED27.2 LED28.2 LED29.2 LED30.2 LED31.2 LED32.2 T1.2 | length 85.2
  Top Layer w0.6: LED5.2 LED4.2 ; LED3.2 LED2.2 -12.421,-12.071 LED1.2 -13.005,-12.939 T1.2 ; LED10.2 LED11.2 ; LED31.2 LED30.2
  Bottom Layer w0.6: LED5.2 LED6.2 LED7.2 LED8.2 LED9.2 LED10.2 ; LED4.2 LED3.2 ; LED11.2 LED12.2 LED13.2 LED14.2 LED15.2 LED16.2 LED17.2 LED18.2 LED19.2 LED20.2 LED21.2 11.195,13.579 LED22.2 LED23.2 LED24.2 LED25.2 LED26.2 LED27.2 LED28.2 LED29.2 LED30.2 ; LED32.2 LED31.2
NetLED2_1: LED2.1 R2.2 | length 4.6
  Bottom Layer w0.3: LED2.1 -12.073,-10.984 -10.693,-12.364 R2.2
NetLED3_1: LED3.1 R3.2 | length 5.8
  Bottom Layer w0.3: R3.2 -15.306,-9.961 -13.277,-7.932 LED3.1
NetLED4_1: LED4.1 R4.2 | length 6.4
  Top Layer w0.3: R4.2 -17.12,-7.793 LED4.1
NetLED5_1: LED5.1 R5.2 | length 10.5
  Bottom Layer w0.3: R5.2 -19.38,-5.592 -18.28,-4.492 -16.592,-4.492 LED5.1 LED5.1@-14.973,-2.645
NetLED6_1: LED6.1 R6.2 | length 12.2
  Top Layer w0.3: R6.2 -19.304,-3.305 -17.786,-1.787 -16.38,-1.787 LED6.1
NetLED7_1: LED7.1 R7.2 | length 2.7
  Bottom Layer w0.3: LED7.1 -13.795,1.89 -13.268,1.363 R7.2@-13.268,0.522
NetLED8_1: LED8.1 R8.2 | length 8.4
  Bottom Layer w0.3: LED8.1 -14.403,3.429 -12.116,1.142 -12.116,-2.495 R8.2@-11.532,-3.079
NetLED9_1: LED9.1 R11.2 | length 6.8
  Bottom Layer w0.3: LED9.1 -13.453,6.092 -13.453,3.496 -10.998,1.041 R11.2
NetLED10_1: LED10.1 R12.2 | length 13.5
  Bottom Layer w0.3: LED10.1 -12.509,3.543 -9.83,0.864 -9.83,-2.722 -9.474,-3.077 R12.2
NetLED11_1: LED11.1 R13.2 | length 10.4
  Top Layer w0.3: R13.2@-13.268,0.522 -13.268,3.424 -11.117,5.575 LED11.1
NetLED12_1: LED12.1 R14.2 | length 11.7
  Top Layer w0.3: R14.2 -10.973,4.42 -9.468,5.925 LED12.1
NetLED13_1: LED13.1 R15.2 | length 3.6
  Top Layer w0.3: LED13.1 -7.595,12.91 R15.2@-7.595,9.292
NetLED14_1: LED14.1 R16.2 | length 1.9
  Top Layer w0.3: LED14.1 -5.436,13.799 R16.2 R16.2@-5.436,12.061
NetLED15_1: LED15.1 R17.2 | length 2.2
  Top Layer w0.3: LED15.1 -3.226,14.445 R17.2@-3.226,12.493
NetLED16_1: LED16.1 R18.2 | length 2.7
  Top Layer w0.3: R18.2 -1.14,12.292 LED16.1
NetLED17_1: LED17.1 R19.2 | length 2.7
  Top Layer w0.3: R19.2 1.016,14.817 LED17.1
NetLED18_1: LED18.1 R20.2 | length 2.4
  Top Layer w0.3: R20.2 3.15,14.357 LED18.1
NetLED19_1: LED19.1 R21.2 | length 1.8
  Top Layer w0.3: LED19.1 5.556,12.304 R21.2@5.6,12.26
  Top Layer w0.5: LED19.1 LED19.1@5.65,13.817
NetLED20_1: LED20.1 R22.2 | length 5
  Top Layer w0.3: R22.2 7.598,11.124 LED20.1
NetLED21_1: LED21.1 R23.2 | length 3.6
  Top Layer w0.3: R23.2 7.518,9.663 LED21.1
NetLED22_1: LED22.1 R24.2 | length 1.9
  Top Layer w0.3: R24.2 10.925,10.056 LED22.1
NetLED23_1: LED23.1 R25.2 | length 6
  Bottom Layer w0.3: R25.2 7.747,7.75 8.785,8.788 10.279,8.788 10.823,8.244 LED23.1
NetLED24_1: LED24.1 R26.2 | length 4.2
  Bottom Layer w0.3: R26.2 10.988,7.184 11.918,6.255 LED24.1
NetLED25_1: LED25.1 R27.2 | length 5
  Top Layer w0.3: R27.2 10.49,3.277 11.335,4.122 LED25.1
NetLED26_1: LED26.1 R28.2 | length 2.5
  Top Layer w0.3: R28.2 14.166,2.587 LED26.1
NetLED27_1: LED27.1 R29.2 | length 2.6
  Top Layer w0.3: R29.2 14.436,-0.918 LED27.1
NetLED28_1: LED28.1 R30.2 | length 5.5
  Bottom Layer w0.3: R30.2 10.185,-2.327 10.531,-1.981 13.09,-1.981 13.751,-2.642 LED28.1
NetLED29_1: LED29.1 R31.2 | length 7.3
  Bottom Layer w0.3: R31.2@12.065,-1.121 13.76,-1.121 14.331,-1.692 15.139,-1.692 15.695,-2.249 15.695,-3.167 14.175,-4.687 LED29.1
NetLED30_1: LED30.1 R32.2 | length 6
  Bottom Layer w0.3: LED30.1 14.289,-7.946 14.289,-9.007 15.242,-9.961 R32.2@17.424,-9.961
NetLED31_1: LED31.1 R33.2 | length 5.3
  Top Layer w0.3: LED31.1 12.074,-10.222 14.072,-12.22 R33.2
NetLED32_1: LED32.1 R34.2 | length 13.3
  Bottom Layer w0.3: R34.2 4.957,-11.434 6.858,-13.335 9.725,-13.335 10.592,-12.467 LED32.1
NetLED33_1: LED33.1 R37.1 | length 4.3
  Bottom Layer w0.3: LED33.1 2.134,2.896 4.293,5.055 R37.1
NetLED34_1: LED34.1 R38.1 | length 1.9
  Bottom Layer w0.3: LED34.1@19,-8.054 19.202,-8.256 R38.1@19.202,-9.905
NetR9_2: R9.2 T1.1 | length 4.5
  Top Layer w0.3: T1.1 -12.998,-16.097 -9.946,-16.097 R9.2
PWM: IC2.14 R9.1 | length 5.8
  Top Layer w0.3: R9.1@-9.779,-17.781 -9.272,-18.288 -5.639,-18.288 -5.373,-18.022 -5.373,-17.901 -5.367,-17.896 IC2.14
RST: C1.1 IC2.7 R10.1 | length 16.3
  Top Layer w0.3: v3(-9.906,-11.76) -9.355,-11.76 -8.779,-12.336 -8.779,-12.633 -8.532,-12.881 IC2.7
  Bottom Layer w0.3: v3(-9.906,-11.76) -9.906,-11.776 -9.592,-12.09 -9.592,-13.651 R10.1 -5.009,-14.683 -4.355,-15.336 -4.355,-16.017 -4.925,-16.586 -6.426,-16.586 -6.707,-16.305 C1.1
SCL: IC2.21 X1.2 | length 14.7
  Top Layer w0.3: IC2.21 -1.867,-17.945 -1.863,-17.945 -1.299,-18.509 7.857,-18.509 9.271,-17.094 X1.2 ; X1.2@9.525,-15.875 X1.2@9.931,-16.281
SDA: IC2.22 X1.3 | length 11.1
  Top Layer w0.3: IC2.22 -1.367,-17.668 -1.027,-18.009 5.842,-18.009 6.731,-17.12 X1.3 ; X1.3@6.985,-15.875 X1.3@7.4,-16.29
SWD_CLK: IC2.37 X3.2 | length 31
  Top Layer w0.3: IC2.37 0.817,-8.331 4.47,-4.678 4.47,2.845 6.35,4.724 9.474,4.724 12.044,7.294 12.901,7.294 13.543,7.936 14.771,7.936 17.553,10.719 X3.2
SWD_IO: IC2.34 X3.3 | length 32.1
  Top Layer w0.3: IC2.34 0.263,-10.881 0.076,-10.693 0.076,-9.779 5.105,-4.75 5.105,2.591 6.604,4.089 10.058,4.089 11.041,5.072 15.242,5.072 X3.3
TEST_LED: IC2.25 R38.2 | length 23.1
  Top Layer w0.3: IC2.25 1.626,-15.787 v1(1.626,-16.281)
  Bottom Layer w0.3: v1(1.626,-16.281) 1.626,-15.138 3.734,-13.03 5.664,-13.03 6.477,-13.843 13.058,-13.843 16.056,-10.846 18.999,-10.846 19.279,-11.125 R38.2@19.279,-11.807
VCC: C2.1 C4.1 IC1.2 IC1.4 IC2.1 IC2.9 IC2.24 IC2.48 R10.2 R35.1 R37.2 | length 38
  Top Layer w0.3: IC2.9 -5.778,-13.881 v1(-5.766,-13.868) -5.253,-13.868 -3.655,-12.271 ; IC2.1 -6.045,-9.881 ; v4(-7.036,-6.375) -6.452,-6.375 -5.867,-6.96 IC2.48 -5.867,-9.703 -6.045,-9.881 ; v1(0.381,-17.069) 0.279,-16.967 IC2.24 -0.367,-15.558 -3.655,-12.271 ; -6.045,-9.881 -3.655,-12.271
  Bottom Layer w0.3: R10.2 -8.56,-13.564 -8.255,-13.868 v1(-5.766,-13.868) ; IC1.2 -6.071,-0.508 -4.674,-1.905 -4.674,-3.378 -5.334,-4.039 -6.963,-4.039 -7.671,-4.746 -7.671,-5.74 v4(-7.036,-6.375) -6.095,-7.317 R35.1 ; C4.1 0.381,-16.588 v1(0.381,-17.069) ; R37.2 4.293,8.763
pads on no net: H1.1 H2.1 H3.1 H4.1 IC2.2 X3.4

## Polygon pours and split planes (outlines as drawn)
GND on Bottom Layer "Bottom Layer-No Net" (solid, pour order 0): -20.32,20.32 20.32,20.32 20.32,-18.415 -20.32,-18.415
GND on Top Layer "Bottom Layer-No Net" (solid, pour order 2): -20.32,20.32 20.32,20.32 20.32,-18.415 -20.32,-18.415

## Other copper
Bottom Layer:
  region net VCC: -9.042,7.112 -9.042,9.952 -6.458,12.536 -2.219,12.536 -1.045,13.71 2.491,13.71 3.664,12.537 6.378,12.537 8.226,10.439 cw(c7.792,10.057) 8.201,9.647 6.809,8.255 3.531,8.255 2.997,8.788 2.997,10.516 2.388,11.125 0.457,11.125 0.127,10.795 0.127,9.423 -1.016,8.28 -2.54,6.756 -3.2,6.096 -3.734,6.096

## Silkscreen, mask and mechanical layers (free items; w line width, h text height)
Top Overlay:
  text "+3.3V" at -12.408,-7.2 h1
  text "GND" at 4.674,-14.402 h1 r90
  text "SCL" at 9.703,-14.529 h0.8 r90
  text "SDA" at 7.112,-14.605 h0.8 r90
  text "+5V" at 12.344,-18.161 h1
Bottom Overlay:
  text "VI.32F030.V1" at 14.199,18.618 h1
  text "+3.3V" at 6.401,3.277 h1
  text "TEST" at 19.6,0 h1 r90
  text "ENC" at 5.207,-3.277 h1
  text "+3.3V" at -6.883,-8.255 h1
  text "RESET" at -4.597,-11.709 h1
  text "I2C" at 4.902,-11.786 h1
  text "GND" at -12.243,-16.104 h1